# Altium PCB VoxPopuli.PcbDoc
Units mm, origin at the board's own origin, x right, y up, seen from the top; angles counter-clockwise.
Board outline 141.2 x 61.2 mm, 2 copper layers (Top Layer, Bottom Layer); 17 components, 30 nets, 98 pads, 0 vias.
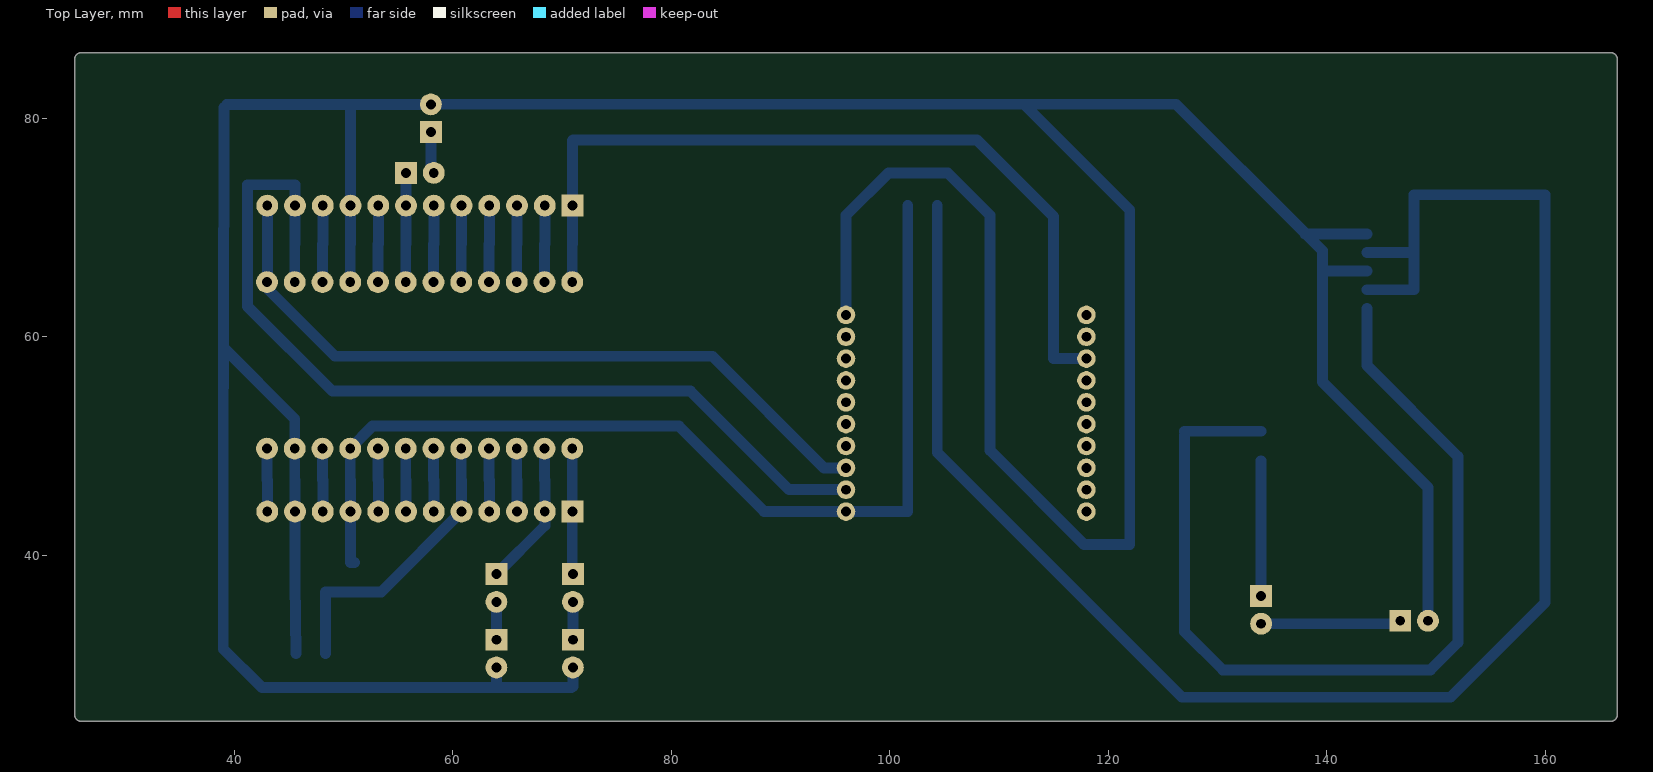
[diagram p0: Top Layer view]
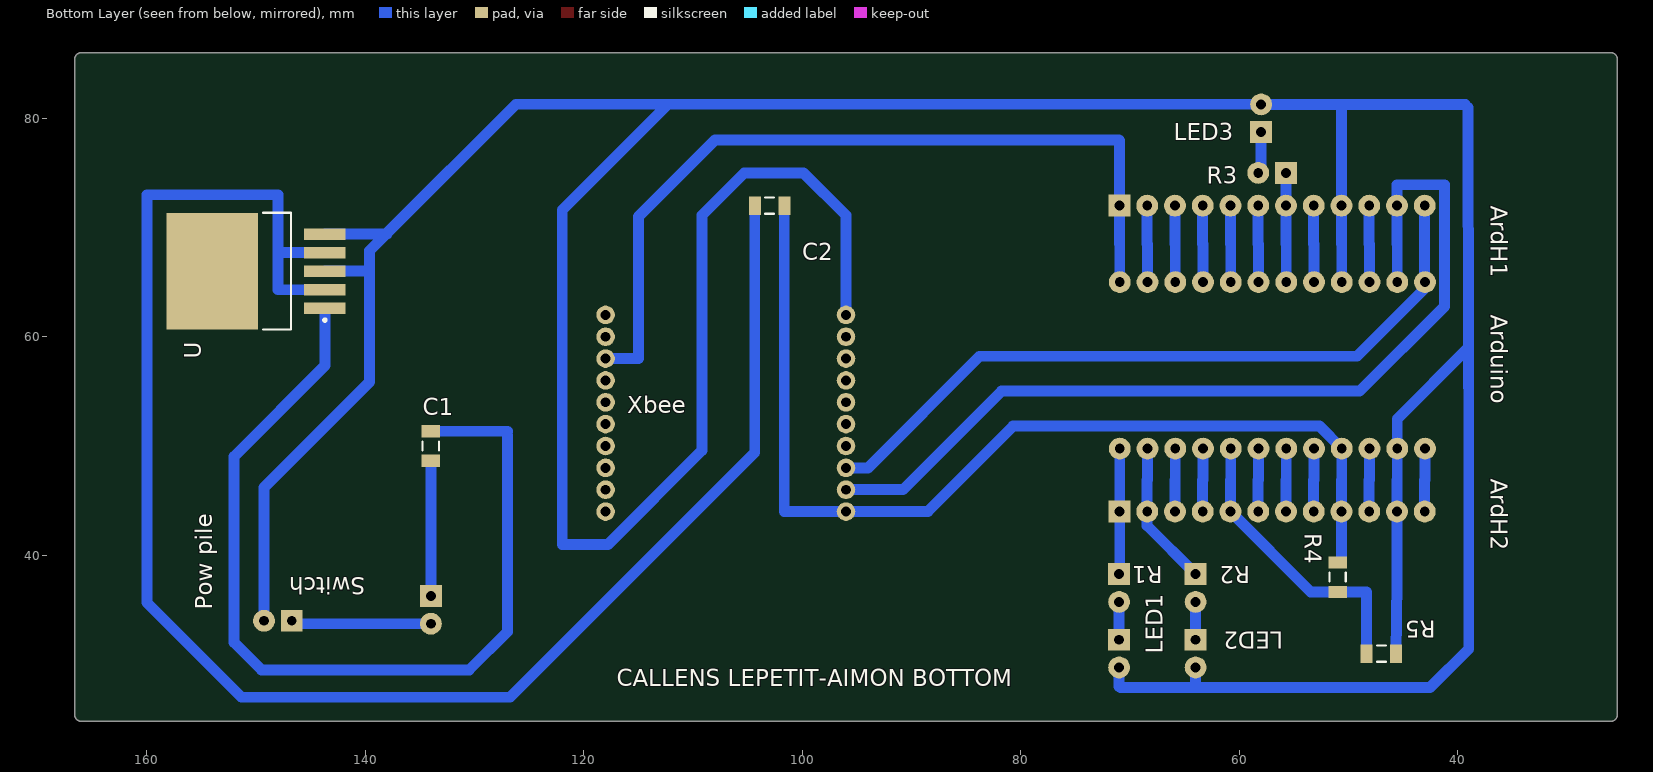
[diagram p1: Bottom Layer view, seen from below]

## Layer stack, top to bottom
Top Solder: solder mask 0.0102, Solder Resist, Dk 3.5
Top Layer: signal copper 0.0356
Dielectric 1: dielectric 0.32, FR-4, Dk 4.8
Bottom Layer: signal copper 0.0356
Bottom Solder: solder mask 0.0102, Solder Resist, Dk 3.5

## Board outline
25.4,25.4 ccw(c26,25.4) 26,24.8 165.8,24.8 ccw(c165.8,25.4) 165.9,24.808 ccw(c166,25.4) 166.6,25.4 166.6,85.4 ccw(c166,85.4) 165.9,85.992 ccw(c165.8,85.4) 165.8,86 26,86 ccw(c26,85.4) 25.4,85.4

## Design rules (kind name [scope] priority, off if disabled: settings)
Clearance [All] p1: gap=0.254
PolygonConnect [All] p1: connectstyle=Relief reliefconductorwidth=0.254 reliefentries=4 polygonreliefangle="90 Angle" airgapwidth=0.254
RoutingTopology [All] p1: topology=Daisy_Simple
RoutingVias [All] p1: holewidth=0.711 width=1.27 viastyle="Through Hole" minholewidth=0.711 minwidth=1.27 maxholewidth=0.711 maxwidth=1.27
SolderMaskExpansion [All] p1: expansion=0.102
Width [All] p1: maxlimit=2 minlimit=1 preferedwidth=1
29 further rules are at their usual default settings.

## Components (designator, comment, footprint, x,y, rotation, side; value= is the part's Value field where it differs from the comment)
ArdH1 "Header 12" "HEADER 12" 57,72 r180 bottom
ArdH2 "Header 12" "HEADER 12" 57,44 r180 bottom
Arduino "Arduino Mini Pro" "ARDUINO DIP 2" 43,65 r270 bottom
C1 "Cap Semi" C1206 134,50 r90 bottom
C2 "Cap Semi" C1206 103,72 r180 bottom
LED1 "Header 2" "HEADER 2" 71,31 r270 bottom
LED2 "Header 2" "HEADER 2" 64,31 r270 bottom
LED3 "Header 2" "HEADER 2" 58,80 r90 bottom
"Pow pile" "Header 2" "HEADER 2" 148,34 r0 bottom
R1 "Header 2" "HEADER 2" 71,37 r270 bottom
R2 "Header 2" "HEADER 2" 64,37 r270 bottom
R3 "Header 2" "HEADER 2" 57,75 r0 bottom
R4 "Res1" C1206 51,38 r270 bottom
R5 "Res1" C1206 47,31 r180 bottom
Switch "Header 2" "HEADER 2" 134,35 r270 bottom
U "TL2575-33IKTTR" KTT5_N 150,66 r0 bottom
Xbee "Xbee" "XBEE DIP 2" 96,44 r0 bottom

## Footprints (in the part's own frame and the unit in brackets; to place one, negate y for a bottom-side part, rotate by r counter-clockwise, add the part's x,y. Pads: shape width x height; smd on the part's side, far side on the other; paste and mask are expansions set on the pad)
"ARDUINO DIP 2" [mm]
  round 2 hole 0.9 unplated: 21(0,0) 22(0,-2.54) 23(0,-5.08) 24(0,-7.62) 25(0,-10.16) 26(0,-12.7) 27(0,-15.24) 28(0,-17.78) 29(0,-20.32) 30(0,-22.86) 31(0,-25.4) 32(0,-27.94) 33(15.24,0) 34(15.24,-2.54) 35(15.24,-5.08) 36(15.24,-7.62) 37(15.24,-10.16) 38(15.24,-12.7) 39(15.24,-15.24) 40(15.24,-17.78) 41(15.24,-20.32) 42(15.24,-22.86) 43(15.24,-25.4) 44(15.24,-27.94)
C1206 [mm] "Chip Capacitor, Body 3.2x1.6mm, IPC High Density"
  rect 1.1x1.7 smd: 1(-1.35,0) 2(1.35,0)
  silkscreen extent -0.4,-0.75 0.4,0.75, body extent -1.7,-0.9 1.7,0.9, height 1.3
"HEADER 2" [mm]
  rect 2x2 hole 0.9: 1(-1.27,0)
  round 2 hole 0.9: 2(1.27,0)
"HEADER 12" [mm]
  rect 2x2 hole 0.9: 1(-13.97,0)
  round 2 hole 0.9: 2(-11.43,0) 3(-8.89,0) 4(-6.35,0) 5(-3.81,0) 6(-1.27,0) 7(1.27,0) 8(3.81,0) 9(6.35,0) 10(8.89,0) 11(11.43,0) 12(13.97,0)
KTT5_N [mm] "D2-PAK, 6-Leads, Body 8.9x10.2mm, Pitch 1.7mm, Lead Span 15.2mm, IPC Medium Density"
  rect 3.8x1.05 smd: 1(-6.3,3.4) 2(-6.3,1.7) 3(-6.3,0) 4(-6.3,-1.7) 5(-6.3,-3.4)
  rect 8.4x10.65 smd: 6(4,0)
  silkscreen extent -6.42,-5.35 -0.65,5.35, body extent -3.2,-5.32 6.45,5.33, height 4.83
"XBEE DIP 2" [mm]
  round 1.7 hole 0.9: 1(0,0) 2(0,-2) 3(0,-4) 4(0,-6) 5(0,-8) 6(0,-10) 7(0,-12) 8(0,-14) 9(0,-16) 10(0,-18) 11(22,-18) 12(22,-16) 13(22,-14) 14(22,-12) 15(22,-10) 16(22,-8) 17(22,-6) 18(22,-4) 19(22,-2) 20(22,0)

## Part data
ArdH1 ArdH2: "Header, 12-Pin"
Arduino: "Arduino Board"
C1 C2: "Capacitor (Semiconductor SIM Model)"
LED1 LED2 LED3 "Pow pile" R1 R2 R3 Switch: "Header, 2-Pin"
R4 R5: "Resistor"
U: "Buck Step Down Regulator with 4.75 to 40 V Input and 3.3 V Output, -40 to 125 degC, 5-Pin DDPAK/TO-263 (KTT), Green (RoHS & no Sb/Br)"
Xbee: "Xbee Card"

## Nets (pads, with @x,y where several pads share a name; then routed paths per layer and width w, separated by ;. In a path a pad name is that pad's centre, name@x,y a point inside that pad or via, vN(x,y) a via of type N, cw(c..) or ccw(c..) an arc to the next point about the centre after c; other vN are vias at no path point)
A1: ArdH2.6 Arduino.39 | length 5.8
  Bottom Layer w1: Arduino.39 58.24,46.893 58.27,46.863 ArdH2.6
A2: ArdH2.7 Arduino.38 | length 5.8
  Bottom Layer w1: Arduino.38 55.7,46.893 55.73,46.863 ArdH2.7
A3: ArdH2.8 Arduino.37 | length 5.8
  Bottom Layer w1: Arduino.37 53.16,46.893 53.19,46.863 ArdH2.8
ADC: ArdH2.5 Arduino.40 R4.2 R5.1 | length 26.9
  Bottom Layer w1: R5.1 48.35,36.65 R4.2 53.46,36.65 ArdH2.5 60.81,46.863 60.78,46.893 Arduino.40
"BOUT. ACTION": ArdH1.6 Arduino.27 | length 7
  Bottom Layer w1: Arduino.27 58.24,68.478 58.27,68.508 ArdH1.6
"BOUT. DOWN": ArdH1.5 Arduino.28 | length 7
  Bottom Layer w1: Arduino.28 60.78,68.478 60.81,68.508 ArdH1.5
"BOUT. LEFT": ArdH1.2 Arduino.31 | length 7
  Bottom Layer w1: Arduino.31 68.4,68.478 68.43,68.508 ArdH1.2
"BOUT. RIGHT": ArdH1.4 Arduino.29 | length 7
  Bottom Layer w1: Arduino.29 63.32,68.478 63.35,68.508 ArdH1.4
"BOUT. UP": ArdH1.3 Arduino.30 | length 7
  Bottom Layer w1: Arduino.30 65.86,68.478 65.89,68.508 ArdH1.3
CIN: C1.1 Switch.1 | length 12.4
  Bottom Layer w1: Switch.1 C1.1
GND: "Pow pile.2" ArdH1.9 ArdH2.11 Arduino.24 Arduino.34 LED1.2 LED2.2 LED3.2 R5.2 U.3 U.5 Xbee.10 | length 395.1
  Bottom Layer w1: 39,56 39.003,55.997 ; 39.049,81 39.009,59 ; 39.32,81.27 50.65,81.27 ; R5.2 45.57,37.52 ArdH2.11 45.57,46.863 45.54,46.893 Arduino.34 45.54,52.469 39.009,59 ; Arduino.24 50.62,68.478 50.65,68.508 ArdH1.9 50.65,81.27 ; LED3.2@58,81 LED3.2 50.65,81.27 ; LED3.2@58,81.28 112.293,81.28 ; 64,27.889 LED2.2 ; LED1.2 71,28 70.889,27.889 42.545,27.889 39,31.434 39,54.392 39.003,55.997 ; Xbee.10 96,71.12 99.88,75 105.315,75 109.195,71.12 109.195,49.606 117.801,41 121.971,41 121.971,71.603 112.293,81.28 ; 138,69.4 138.093,69.4 ; U.3 139.624,66 ; U.5 138.093,69.4 ; 149.27,34 149.27,46.208 139.624,55.855 139.624,66 ; 39.003,55.997 39.009,59 ; 112.293,81.28 126.213,81.28 138.093,69.4 ; 138.093,69.4 139.624,67.869 139.624,66
LED1: LED1.1 R1.2 | length 3.5
  Bottom Layer w1: LED1.1 71,33.985 ; 71,33.985 R1.2
LED2: LED2.1 R2.2 | length 3.5
  Bottom Layer w1: LED2.1 64,33.985 R2.2
LED3: LED3.1 R3.2 | length 3.5
  Bottom Layer w1: R3.2@58,75.27 LED3.1
MISO: ArdH2.3 Arduino.42 | length 5.8
  Bottom Layer w1: Arduino.42 65.86,46.893 65.89,46.863 ArdH2.3
ON/SLEEP: ArdH1.1 Arduino.32 Xbee.13 | length 75.9
  Bottom Layer w1: Arduino.32 70.94,68.478 70.97,68.508 ArdH1.1 70.97,77.97 71,78 108,78 115,71 115,58 Xbee.13
PIN25: ArdH1.8 Arduino.25 | length 7
  Bottom Layer w1: Arduino.25 53.16,68.478 53.19,68.508 ArdH1.8
R1: ArdH2.1 Arduino.44 R1.1 | length 11.4
  Bottom Layer w1: R1.1@70.94,38.33 Arduino.44
R2: ArdH2.2 Arduino.43 R2.1 | length 13.3
  Bottom Layer w1: R2.1 68.43,42.7 ArdH2.2 68.43,46.863 68.4,46.893 Arduino.43
R3: ArdH1.7 Arduino.26 R3.1 | length 10
  Bottom Layer w1: Arduino.26 55.7,68.478 55.73,68.508 ArdH1.7 55.73,73.482 R3.1
RAW: ArdH2.12 Arduino.33 | length 5.8
  Bottom Layer w1: Arduino.33 43,46.893 43.03,46.863 ArdH2.12
RESET: ArdH1.10 Arduino.23 | length 7
  Bottom Layer w1: Arduino.23 48.08,68.478 48.11,68.508 ArdH1.10
RESET1: ArdH2.10 Arduino.35 | length 5.8
  Bottom Layer w1: Arduino.35 48.08,46.893 48.11,46.863 ArdH2.10
RX: ArdH1.11 Arduino.22 Xbee.2 | length 86.1
  Bottom Layer w1: Arduino.22 45.54,68.478 45.57,68.508 ArdH1.11 45.57,73.914 41.224,73.914 41.224,62.776 48.984,55.016 81.767,55.016 90.784,46 Xbee.2
SCK: ArdH2.4 Arduino.41 | length 5.8
  Bottom Layer w1: Arduino.41 63.32,46.893 63.35,46.863 ArdH2.4
TX: ArdH1.12 Arduino.21 Xbee.3 | length 67.4
  Bottom Layer w1: Arduino.21 Arduino.21@43.03,65 ; ArdH1.12 Arduino.21@43.03,65 ; Xbee.3 94,48 83.783,58.217 49.225,58.217 43.03,64.412 Arduino.21@43.03,65
UIN: C1.2 U.1 | length 86.5
  Bottom Layer w1: 127,51 127,33 130.485,29.515 149.515,29.515 152,32 152,49.041 143.688,57.353 143.688,62.6 U.1 ; 127,51.35 C1.2
UOUT: C2.1 U.2 U.4 | length 157.5
  Bottom Layer w1: C2.1 104.35,49.396 126.746,27 151.333,27 160,35.667 160,73 148,73 148,64.3 U.2 ; U.4 147.7,67.7
VCC: "Pow pile.1" Switch.2 | length 12.5
  Bottom Layer w1: Switch.2 146.46,33.73
VIN: ArdH2.9 Arduino.36 C2.2 R4.1 Xbee.1 | length 93.9
  Bottom Layer w1: R4.1 50.65,39.35 ArdH2.9 50.65,46.863 50.62,46.893 Arduino.36 52.676,51.816 80.696,51.816 88.512,44 Xbee.1 101.65,44 C2.2
pads on no net: U.6 Xbee.4 Xbee.5 Xbee.6 Xbee.7 Xbee.8 Xbee.9 Xbee.11 Xbee.12 Xbee.14 Xbee.15 Xbee.16 Xbee.17 Xbee.18 Xbee.19 Xbee.20

## Silkscreen, mask and mechanical layers (free items; w line width, h text height)
Bottom Overlay:
  text "CALLENS LEPETIT-AIMON BOTTOM" at 117,28 h1.52
Mechanical 1:
  lines w1.2: 165.8,25.4 26,25.4 26,85.4 165.8,85.4 ; 166,25.4 166,85.4